# Altium PCB projet_pcb_wordclock.PCBDOC
Units mm, origin at the board's own origin, x right, y up, seen from the top; angles counter-clockwise.
Board outline 200.03 x 200.03 mm, 2 copper layers (TopLayer, BottomLayer); 83 components, 38 nets, 243 pads, 77 vias.
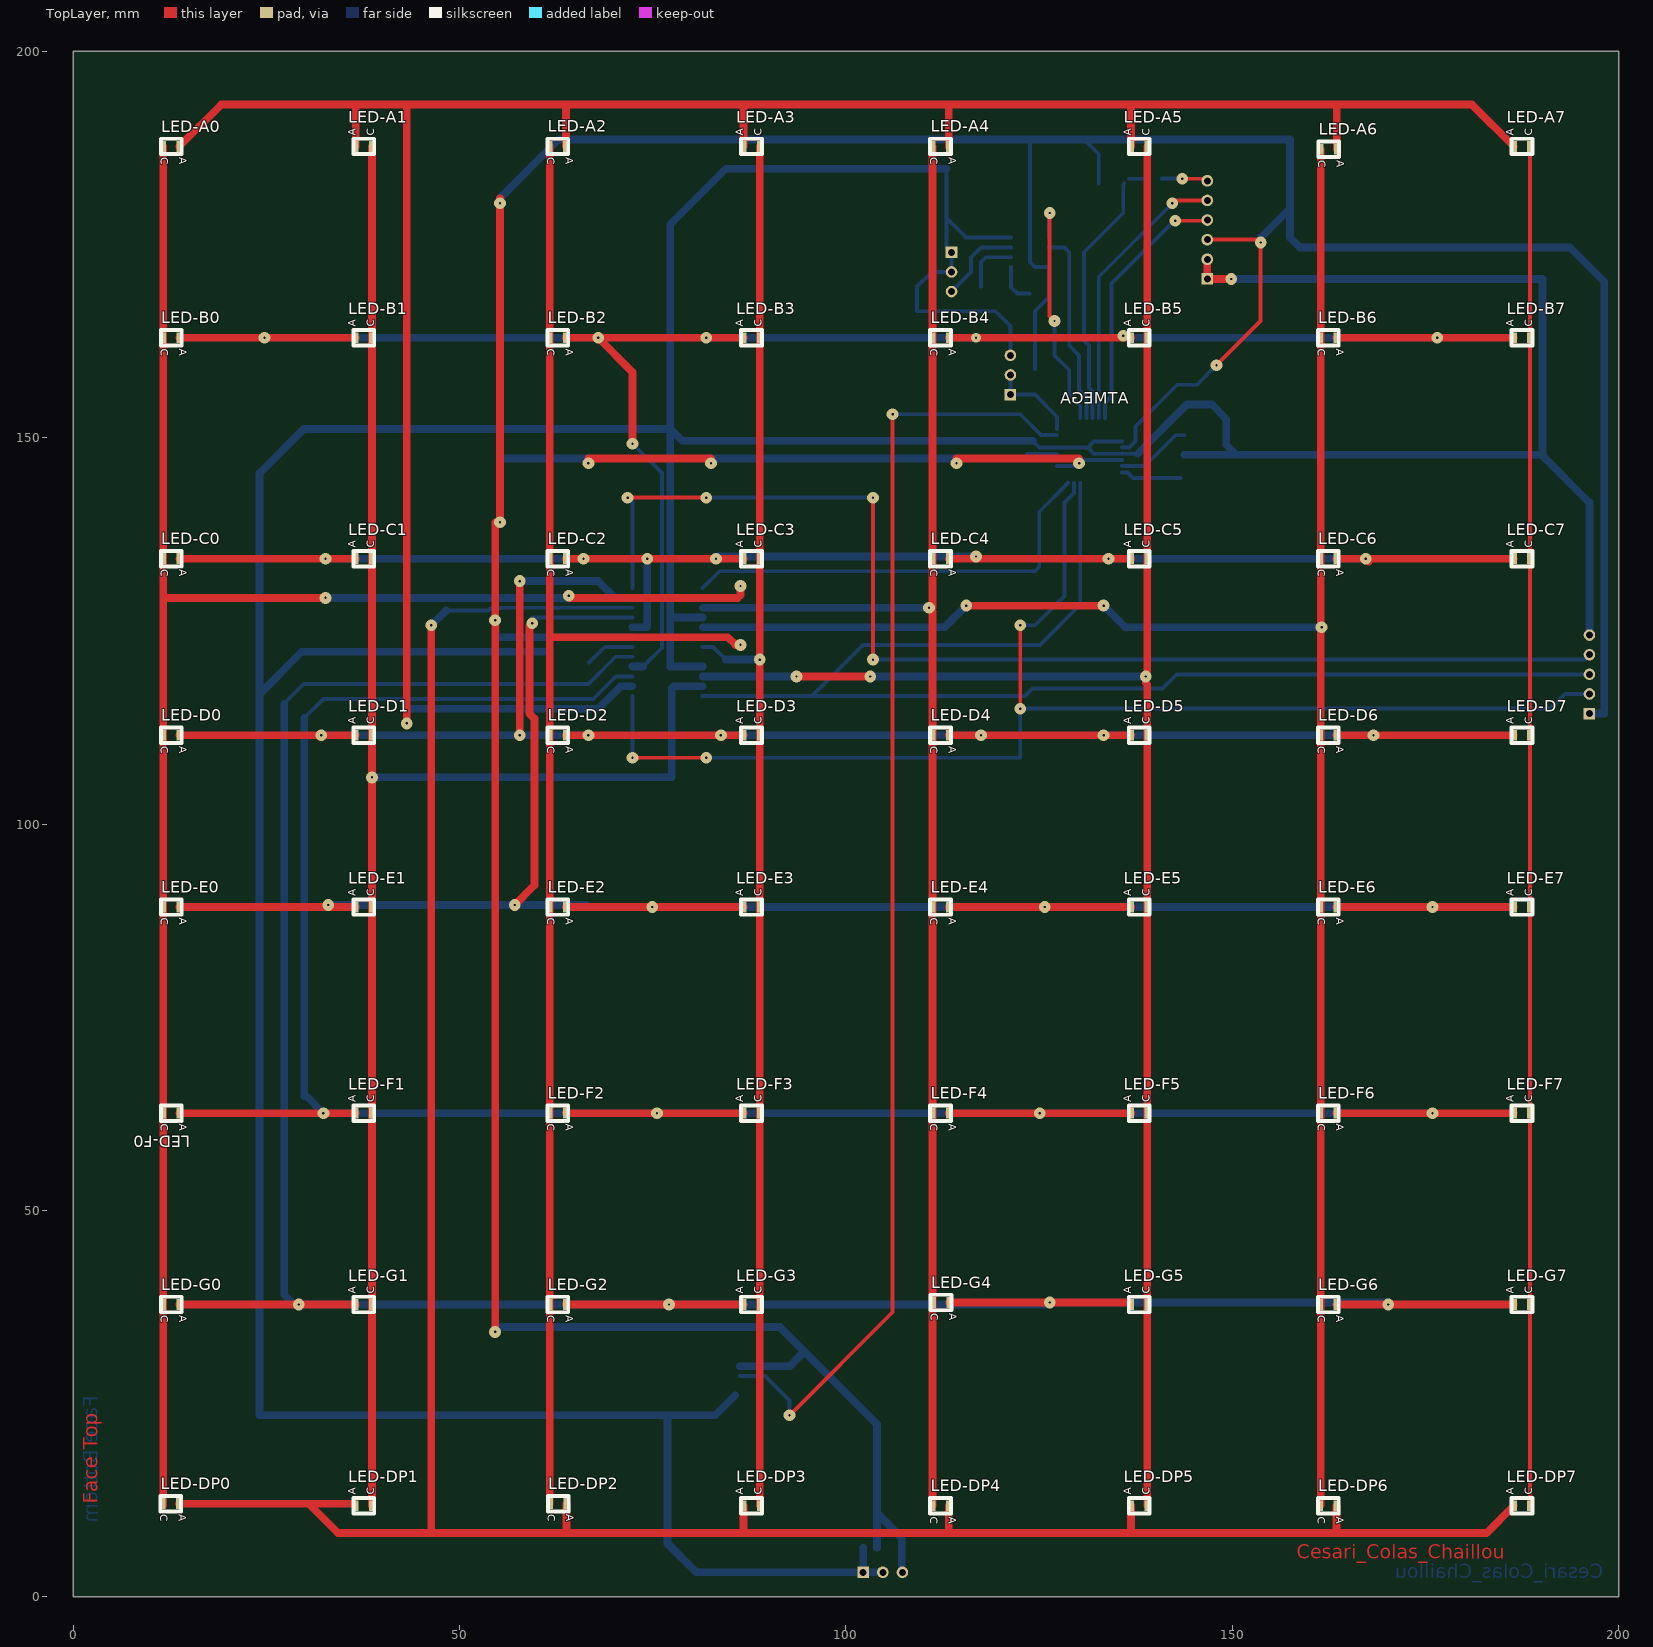
[diagram p0: TopLayer view]
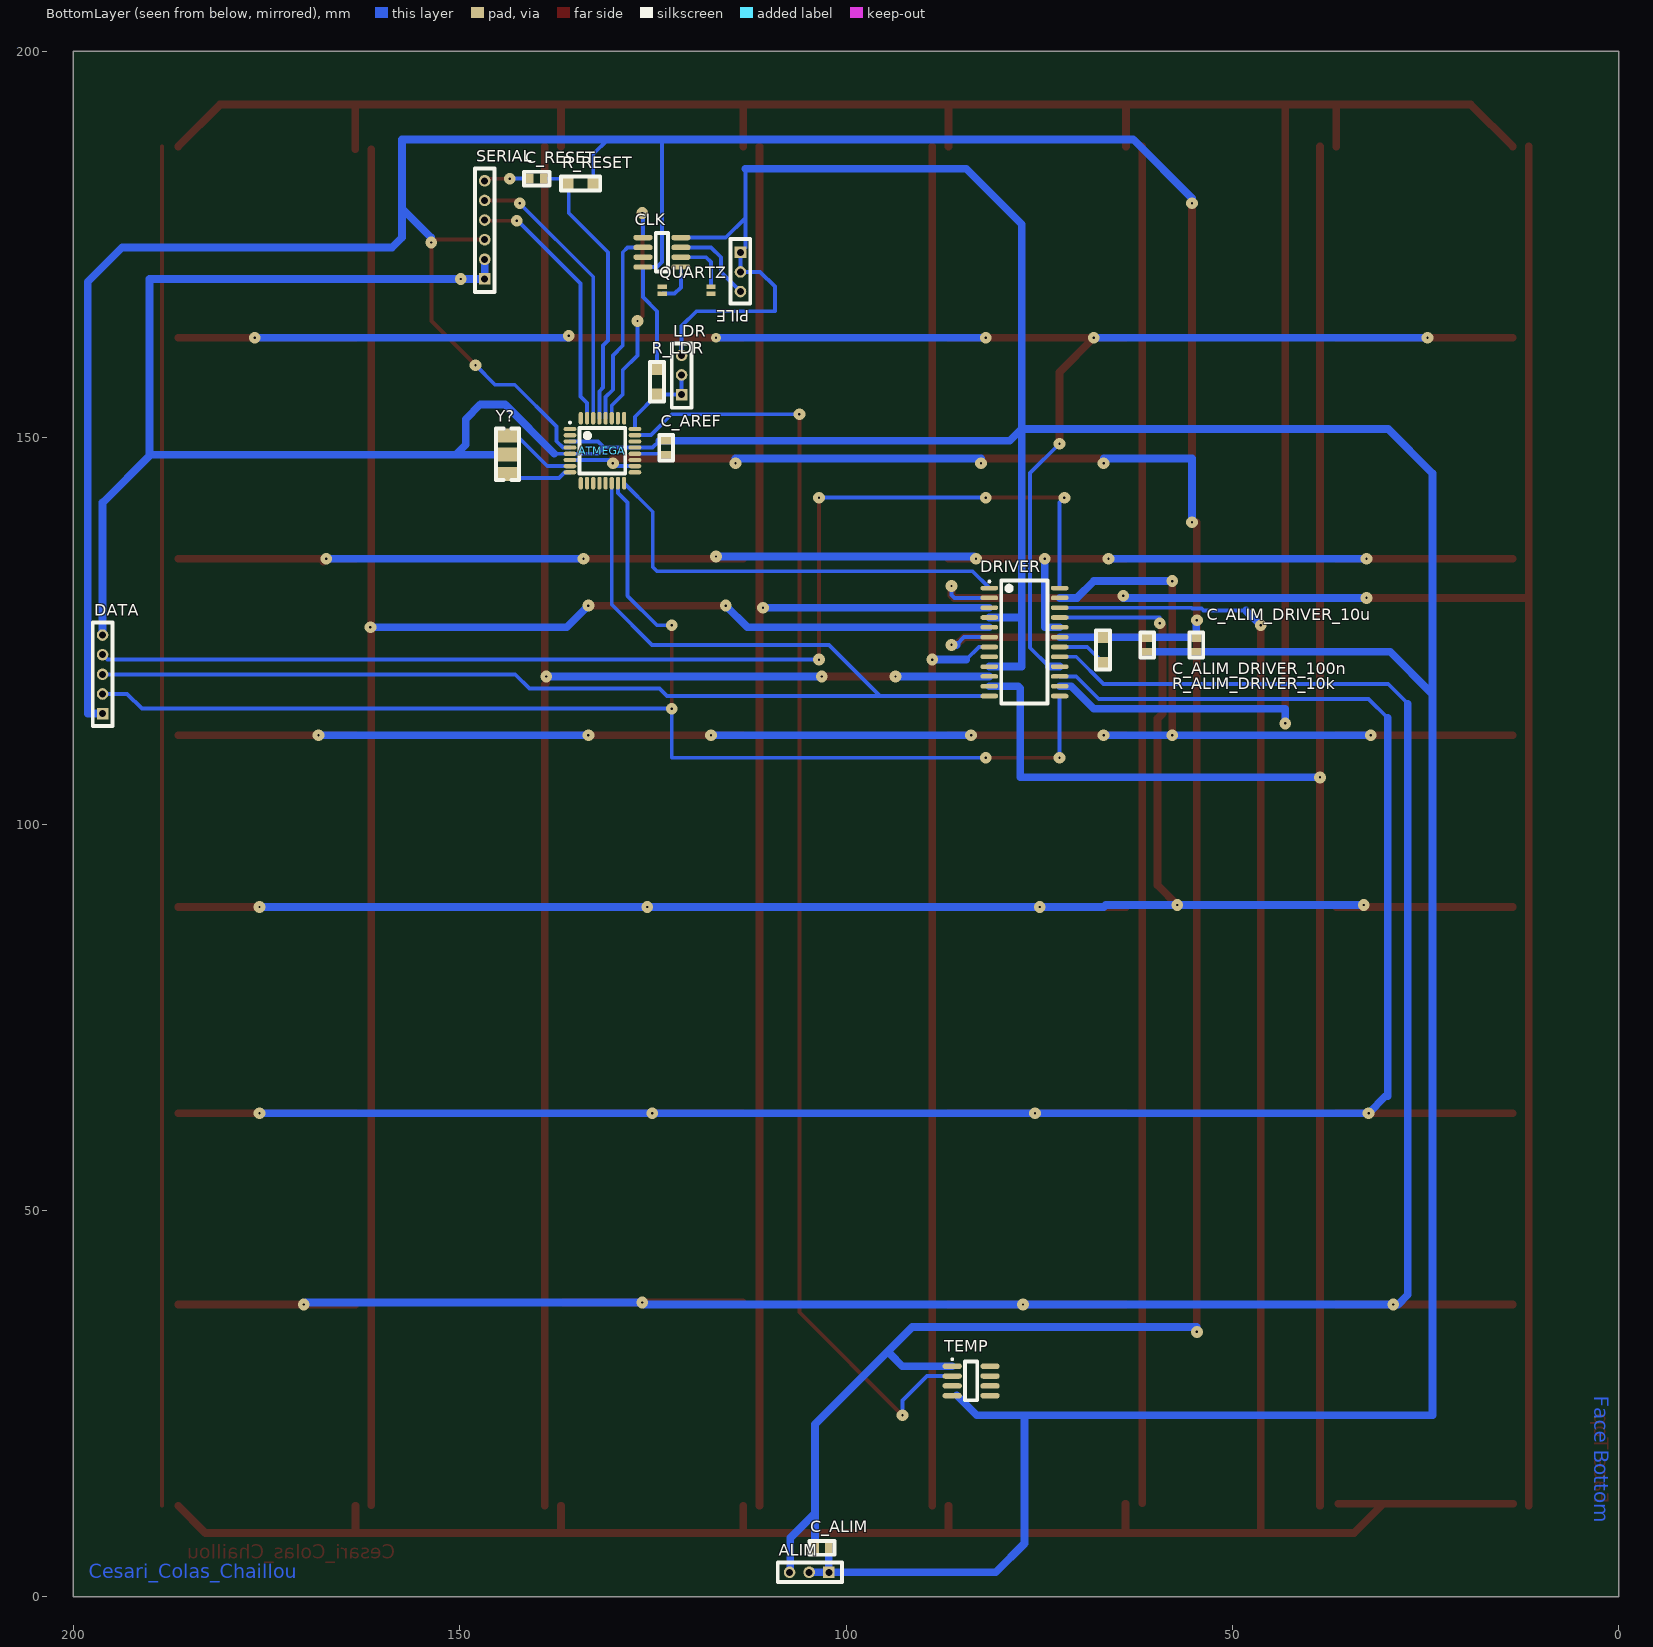
[diagram p1: BottomLayer view, seen from below]
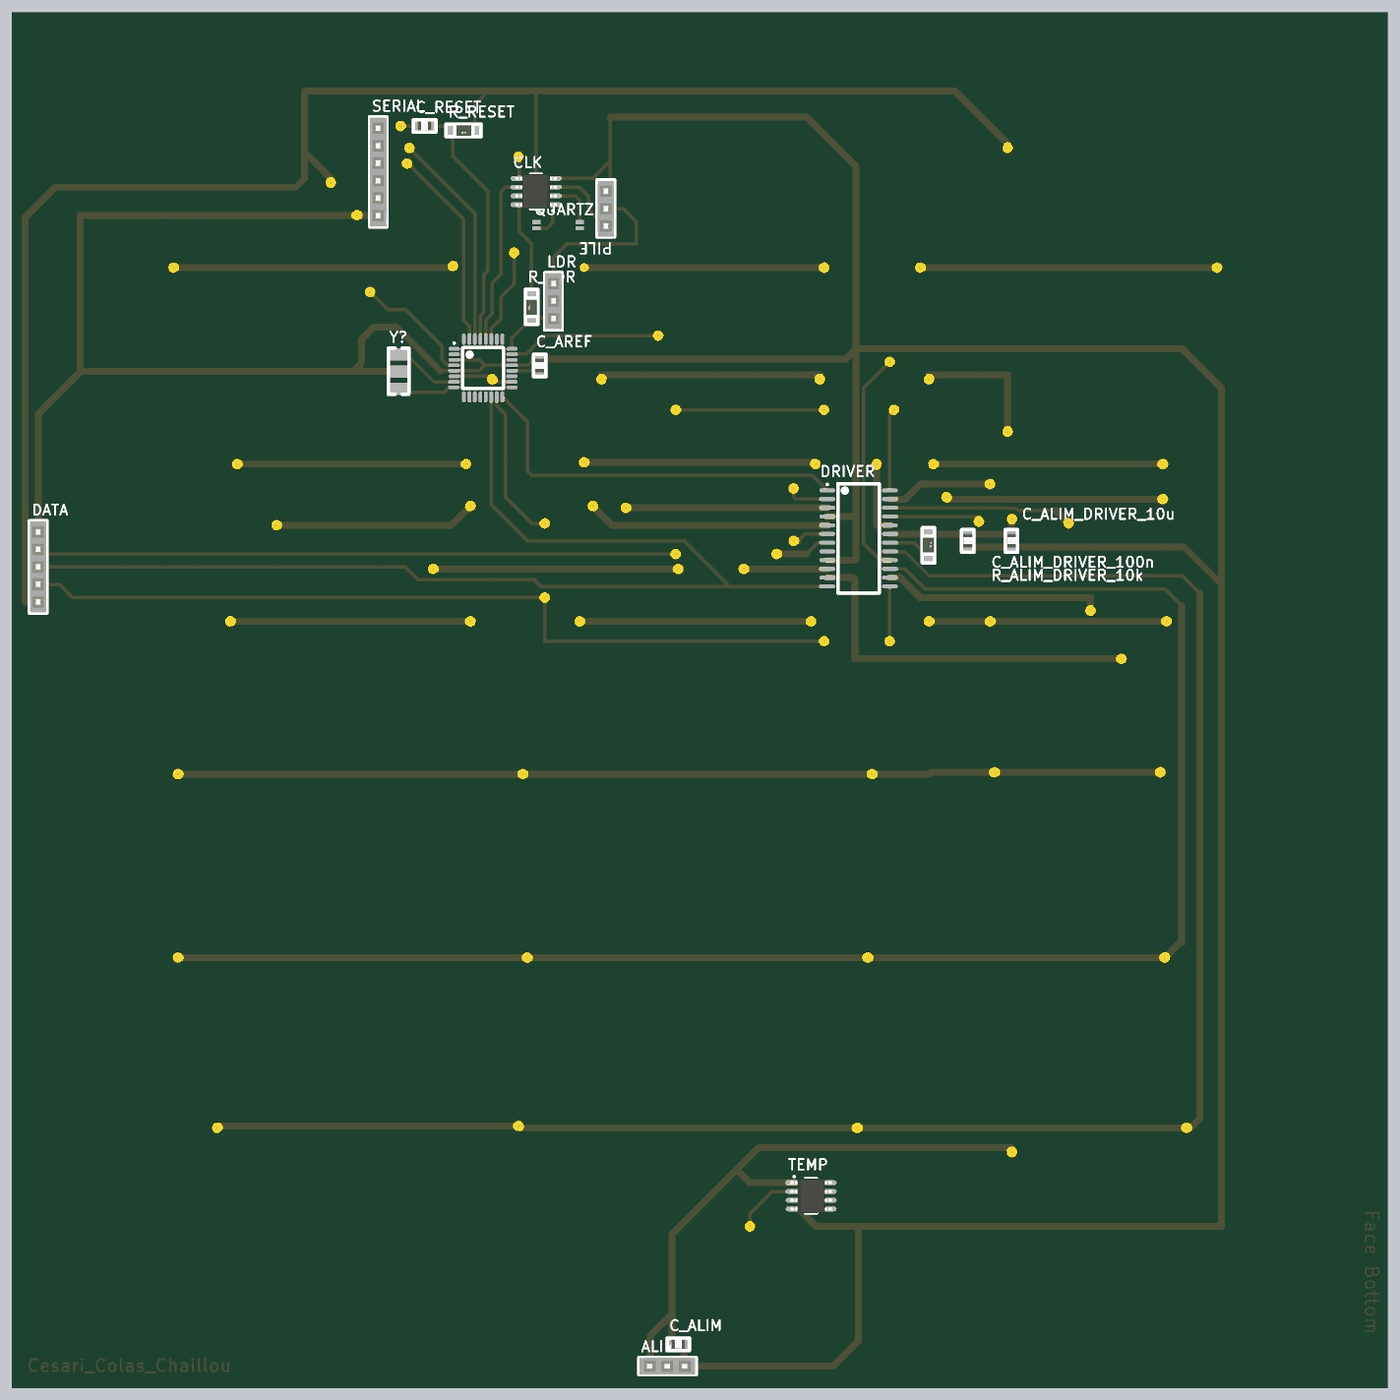
[diagram p2: 3D render of the assembled board from below, using the file's embedded part models]

## Layer stack, top to bottom
TopSolder: solder mask 0.0102, Solder Resist, Dk 3.5
TopLayer: signal copper 0.0356
Dielectric1: core 0.32, FR-4, Dk 4.8
BottomLayer: signal copper 0.0356
BottomSolder: solder mask 0.0102, Solder Resist, Dk 3.5

## Board outline
0,0 0,200.025 200.025,200.025 200.025,0

## Design rules (kind name [scope] priority, off if disabled: settings)
Clearance [All] p1: gap=0.25
FabricationTestPointUsage TestPointUsage [All] p1: valid=0 allowmultiple=FALSE
FabricationTestpoint Testpoint [All] p1: side=3 testpointundercomponent=TRUE minsize=1.016 maxsize=2.54 preferedsize=1.524 minholesize=0.508 maxholesize=1.016 preferedholesize=0.813 testpointgrid=0.025 allowsidetop=TRUE allowsidebottom=TRUE usegrid=TRUE gridtolerance=0
PlaneConnect [All] p1: planeconnectstyle=Relief reliefexpansion=0.5 reliefentries=4 reliefconductorwidth=1.016 reliefairgap=0.5
PolygonConnect [All] p1: connectstyle=Relief reliefconductorwidth=1.016 reliefentries=4 polygonreliefangle="90 Angle" airgapwidth=0.254
RoutingVias [All] p1: holewidth=0.3 width=1.524 viastyle="Through Hole" minholewidth=0.3 minwidth=1.524 maxholewidth=0.3 maxwidth=1.524
ShortCircuit [All] p1: allowed=TRUE
SilkToSolderMaskClearance SilkscreenOverComponentPads [IsPad] p1: minsilkscreentomaskgap=0.254 clearancetoexposedcopper=TRUE
SolderMaskExpansion [All] p1: expansion=0.051
Width Width_Power [(InNet('GND') OR InNet('+5V')  OR InNet('+3V3') OR InNet('VCC'))] p1: maxlimit=7.62 minlimit=0.406 preferedwidth=1.27
Width [All] p2: maxlimit=3 minlimit=0.5 preferedwidth=1 minimp=50.000000 maximp=50.000000 favimp=50.000000
24 further rules are at their usual default settings.

## Components (designator, comment, footprint, x,y, rotation, side; value= is the part's Value field where it differs from the comment)
ALIM "BARRETTE 3 CONTACTS 1 RANGEE FEMELLE DROITE" BARRETTE_3_F_D 102.235,3.175 r0 bottom
ATMEGA "ATmega328P-AU" 32A_N 131.525,148.32 r180 bottom
C_ALIM "CMS_0805" CONDENSATEUR_CMS_0805 102.235,6.35 r0 bottom
C_ALIM_DRIVER_10u "CMS_0805" CONDENSATEUR_CMS_0805 54.69,122.285 r90 bottom
C_ALIM_DRIVER_100n "CMS_0805" CONDENSATEUR_CMS_0805 61.04,122.285 r90 bottom
C_AREF "CMS_0805" CONDENSATEUR_CMS_0805 123.27,149.59 r270 bottom
C_RESET "CMS_0805" CONDENSATEUR_CMS_0805 139.129,183.515 r0 bottom
CLK "24AA1025_SOIC8" SOIC8_PAS=1.27_LARG=4_LONG=5 123.825,173.99 r0 bottom
DATA "BARRETTE_5 CONTACTS_1 RANGEE_FEMELLE_DROITE" BARRETTE_5_F_D 196.215,114.3 r90 bottom
DRIVER "MAX7219CWG" WSO24_N 76.915,123.555 r180 bottom
LDR "BARRETTE 3 CONTACTS 1 RANGEE FEMELLE DROITE" BARRETTE_3_F_D 121.285,155.575 r90 bottom
LED-A0 "LED_CMS_PLCC2" LED_CMS_PLCC2 14.05,187.69 r270 top
LED-A1 "LED_CMS_PLCC2" LED_CMS_PLCC2 36.275,187.69 r90 top
LED-A2 "LED_CMS_PLCC2" LED_CMS_PLCC2 64.075,187.69 r270 top
LED-A3 "LED_CMS_PLCC2" LED_CMS_PLCC2 86.44,187.69 r90 top
LED-A4 "LED_CMS_PLCC2" LED_CMS_PLCC2 113.605,187.69 r270 top
LED-A5 "LED_CMS_PLCC2" LED_CMS_PLCC2 136.605,187.69 r90 top
LED-A6 "LED_CMS_PLCC2" LED_CMS_PLCC2 163.83,187.325 r270 top
LED-A7 "LED_CMS_PLCC2" LED_CMS_PLCC2 186.135,187.69 r90 top
LED-B0 "LED_CMS_PLCC2" LED_CMS_PLCC2 14.05,162.925 r270 top
LED-B1 "LED_CMS_PLCC2" LED_CMS_PLCC2 36.275,162.925 r90 top
LED-B2 "LED_CMS_PLCC2" LED_CMS_PLCC2 64.075,162.925 r270 top
LED-B3 "LED_CMS_PLCC2" LED_CMS_PLCC2 86.44,162.925 r90 top
LED-B4 "LED_CMS_PLCC2" LED_CMS_PLCC2 113.605,162.925 r270 top
LED-B5 "LED_CMS_PLCC2" LED_CMS_PLCC2 136.605,162.925 r90 top
LED-B6 "LED_CMS_PLCC2" LED_CMS_PLCC2 163.77,162.925 r270 top
LED-B7 "LED_CMS_PLCC2" LED_CMS_PLCC2 186.135,162.925 r90 top
LED-C0 "LED_CMS_PLCC2" LED_CMS_PLCC2 14.05,134.35 r270 top
LED-C1 "LED_CMS_PLCC2" LED_CMS_PLCC2 36.275,134.35 r90 top
LED-C2 "LED_CMS_PLCC2" LED_CMS_PLCC2 64.075,134.35 r270 top
LED-C3 "LED_CMS_PLCC2" LED_CMS_PLCC2 86.44,134.35 r90 top
LED-C4 "LED_CMS_PLCC2" LED_CMS_PLCC2 113.605,134.35 r270 top
LED-C5 "LED_CMS_PLCC2" LED_CMS_PLCC2 136.605,134.35 r90 top
LED-C6 "LED_CMS_PLCC2" LED_CMS_PLCC2 163.77,134.35 r270 top
LED-C7 "LED_CMS_PLCC2" LED_CMS_PLCC2 186.135,134.35 r90 top
LED-D0 "LED_CMS_PLCC2" LED_CMS_PLCC2 14.05,111.49 r270 top
LED-D1 "LED_CMS_PLCC2" LED_CMS_PLCC2 36.275,111.49 r90 top
LED-D2 "LED_CMS_PLCC2" LED_CMS_PLCC2 64.075,111.49 r270 top
LED-D3 "LED_CMS_PLCC2" LED_CMS_PLCC2 86.44,111.49 r90 top
LED-D4 "LED_CMS_PLCC2" LED_CMS_PLCC2 113.605,111.49 r270 top
LED-D5 "LED_CMS_PLCC2" LED_CMS_PLCC2 136.605,111.49 r90 top
LED-D6 "LED_CMS_PLCC2" LED_CMS_PLCC2 163.77,111.49 r270 top
LED-D7 "LED_CMS_PLCC2" LED_CMS_PLCC2 186.135,111.49 r90 top
LED-DP0 "LED_CMS_PLCC2" LED_CMS_PLCC2 13.97,12.065 r270 top
LED-DP1 "LED_CMS_PLCC2" LED_CMS_PLCC2 36.275,11.795 r90 top
LED-DP2 "LED_CMS_PLCC2" LED_CMS_PLCC2 64.135,12.065 r270 top
LED-DP3 "LED_CMS_PLCC2" LED_CMS_PLCC2 86.44,11.795 r90 top
LED-DP4 "LED_CMS_PLCC2" LED_CMS_PLCC2 113.605,11.795 r270 top
LED-DP5 "LED_CMS_PLCC2" LED_CMS_PLCC2 136.605,11.795 r90 top
LED-DP6 "LED_CMS_PLCC2" LED_CMS_PLCC2 163.77,11.795 r270 top
LED-DP7 "LED_CMS_PLCC2" LED_CMS_PLCC2 186.135,11.795 r90 top
LED-E0 "LED_CMS_PLCC2" LED_CMS_PLCC2 14.05,89.265 r270 top
LED-E1 "LED_CMS_PLCC2" LED_CMS_PLCC2 36.275,89.265 r90 top
LED-E2 "LED_CMS_PLCC2" LED_CMS_PLCC2 64.075,89.265 r270 top
LED-E3 "LED_CMS_PLCC2" LED_CMS_PLCC2 86.44,89.265 r90 top
LED-E4 "LED_CMS_PLCC2" LED_CMS_PLCC2 113.605,89.265 r270 top
LED-E5 "LED_CMS_PLCC2" LED_CMS_PLCC2 136.605,89.265 r90 top
LED-E6 "LED_CMS_PLCC2" LED_CMS_PLCC2 163.77,89.265 r270 top
LED-E7 "LED_CMS_PLCC2" LED_CMS_PLCC2 186.135,89.265 r90 top
LED-F0 "LED_CMS_PLCC2" LED_CMS_PLCC2 14.05,62.595 r270 top
LED-F1 "LED_CMS_PLCC2" LED_CMS_PLCC2 36.275,62.595 r90 top
LED-F2 "LED_CMS_PLCC2" LED_CMS_PLCC2 64.075,62.595 r270 top
LED-F3 "LED_CMS_PLCC2" LED_CMS_PLCC2 86.44,62.595 r90 top
LED-F4 "LED_CMS_PLCC2" LED_CMS_PLCC2 113.605,62.595 r270 top
LED-F5 "LED_CMS_PLCC2" LED_CMS_PLCC2 136.605,62.595 r90 top
LED-F6 "LED_CMS_PLCC2" LED_CMS_PLCC2 163.77,62.595 r270 top
LED-F7 "LED_CMS_PLCC2" LED_CMS_PLCC2 186.135,62.595 r90 top
LED-G0 "LED_CMS_PLCC2" LED_CMS_PLCC2 14.05,37.83 r270 top
LED-G1 "LED_CMS_PLCC2" LED_CMS_PLCC2 36.275,37.83 r90 top
LED-G2 "LED_CMS_PLCC2" LED_CMS_PLCC2 64.075,37.83 r270 top
LED-G3 "LED_CMS_PLCC2" LED_CMS_PLCC2 86.44,37.83 r90 top
LED-G4 "LED_CMS_PLCC2" LED_CMS_PLCC2 113.665,38.1 r270 top
LED-G5 "LED_CMS_PLCC2" LED_CMS_PLCC2 136.605,37.83 r90 top
LED-G6 "LED_CMS_PLCC2" LED_CMS_PLCC2 163.77,37.83 r270 top
LED-G7 "LED_CMS_PLCC2" LED_CMS_PLCC2 186.135,37.83 r90 top
PILE "BARRETTE 3 CONTACTS 1 RANGEE FEMELLE DROITE" BARRETTE_3_F_D 113.665,173.99 r270 bottom
QUARTZ "QUARTZ 32.768KHZ, 12.5PF, 7 X 1.5MM" "QUARTZ_CMS_FA238_4PLOTS - duplicate" 117.475,169.545 r0 bottom
R_ALIM_DRIVER_10k "RESISTANCE_CMS_1206" RESISTANCE_CMS_1206 66.755,124.19 r270 bottom
R_LDR "RESISTANCE_CMS_1206" RESISTANCE_CMS_1206 124.46,155.575 r90 bottom
R_RESET "RESISTANCE_CMS_1206" RESISTANCE_CMS_1206 132.715,182.88 r0 bottom
SERIAL "BARRETTE_6 CONTACTS_1 RANGEE_FEMELLE_DROITE" BARRETTE_6_F_D 146.765,170.545 r90 bottom
TEMP "24AA1025_SOIC8" SOIC8_PAS=1.27_LARG=4_LONG=5 83.82,27.94 r180 bottom
Y? "OSCILLATEUR_CERA_CMS" OSCILLATEUR_CERA_CMS 142.32,144.51 r90 bottom

## Footprints (in the part's own frame and the unit in brackets; to place one, negate y for a bottom-side part, rotate by r counter-clockwise, add the part's x,y. Pads: shape width x height; smd on the part's side, far side on the other; paste and mask are expansions set on the pad)
32A_N [mm] "Thin QFP, 32-Leads, Body 7x7mm, Pitch 0.8mm, IPC Medium Density"
  oval 1.65x0.55 smd: 1(-4.2,2.8) 2(-4.2,2) 3(-4.2,1.2) 4(-4.2,0.4) 5(-4.2,-0.4) 6(-4.2,-1.2) 7(-4.2,-2) 8(-4.2,-2.8) 17(4.2,-2.8) 18(4.2,-2) 19(4.2,-1.2) 20(4.2,-0.4) 21(4.2,0.4) 22(4.2,1.2) 23(4.2,2) 24(4.2,2.8)
  oval 0.55x1.65 smd: 9(-2.8,-4.2) 10(-2,-4.2) 11(-1.2,-4.2) 12(-0.4,-4.2) 13(0.4,-4.2) 14(1.2,-4.2) 15(2,-4.2) 16(2.8,-4.2) 25(2.8,4.2) 26(2,4.2) 27(1.2,4.2) 28(0.4,4.2) 29(-0.4,4.2) 30(-1.2,4.2) 31(-2,4.2) 32(-2.8,4.2)
  silkscreen extent -4.33,-2.95 2.95,3.75, body extent -3.5,-3.5 3.5,3.5, height 1.2
BARRETTE_3_F_D [mm] "BARRETTE 3 CONTACTS ; 1 RANGEE ; DROITE ; FEMELLE ; ESPACEMENT BROCHES = 2.54 mm"
  rect 1.5x1.5 hole 0.9: 1(0,0)
  round 1.5 hole 0.9: 2(2.54,0) 3(5.08,0)
  silkscreen extent -1.7,-1.27 6.61,1.27, body extent -1.56,-1.21 6.56,1.2, height 8.5
BARRETTE_5_F_D [mm] "BARRETTE 5 CONTACTS ; 1 RANGEE ; DROITE ; FEMELLE ; ESPACEMENT BROCHES = 2.54 mm"
  rect 1.5x1.5 hole 0.9: 1(0,0)
  round 1.5 hole 0.9: 2(2.54,0) 3(5.08,0) 4(7.62,0) 5(10.16,0)
  silkscreen extent -1.6,-1.27 11.8,1.27, body extent -1.5,-1.2 11.7,1.21, height 8.5
BARRETTE_6_F_D [mm] "BARRETTE 6 CONTACTS ; 1 RANGEE ; DROITE ; FEMELLE ; ESPACEMENT BROCHES = 2.54 mm"
  rect 1.5x1.5 hole 0.9: 1(0,0)
  round 1.5 hole 0.9: 2(2.54,0) 3(5.08,0) 4(7.62,0) 5(10.16,0) 6(12.7,0)
  silkscreen extent -1.7,-1.27 14.3,1.27, body extent -1.57,-1.2 14.17,1.21, height 8.5
CONDENSATEUR_CMS_0805 [mm] "CONDENSATEUR CMS 0805 ; DIMENSIONS : 2mm x 1.25mm"
  rect 1x1.3 smd: 1(0,0) 2(1.79,-0.01)
  silkscreen extent -0.74,-0.9 2.53,0.89, body extent -0.09,-0.67 1.91,0.64, height 0.73
LED_CMS_PLCC2 [mm] "LED CMS PLCC2 ; DIMENSIONS : 2.7mm x 2.0mm"
  rect 1.4x0.75 smd: 1(0,-0.3) 2(0,-2.4)
  silkscreen extent -1,-2.7 1,0
OSCILLATEUR_CERA_CMS [mm] "OSCILLATEUR_CERA_CMS;  DIMENSIONS : 7.4mm x 3.4mm ; ESPACEMENT BROCHES : 1.5mm"
  rect 1.8x3.4 smd: 1(0.8,1.5) 2(5.8,1.5) 3(3.3,1.5)
  silkscreen extent 0,0 6.7,3
"QUARTZ_CMS_FA238_4PLOTS - duplicate" [mm] "QUARTZ 32.768KHZ, 12.5PF, 7 X 1.5MM"
  rect 1.2x0.6 smd: 1(0,0) 2(6.3,0) 3(6.3,0.9) 4(0,0.9)
RESISTANCE_CMS_1206 [mil] "RESISTANCE CMS 1206 ; DIMENSIONS : 3.2mm x 1.6mm"
  rect 60x60 smd: 1(0,0) 2(130,0)
  silkscreen extent -35,-35 165,35, body extent 0,-31 126,31, height 39
SOIC8_PAS=1.27_LARG=4_LONG=5 [mm] "Small Outline Integrated Circuit ; 8 Leads ; Body Width = 4 mm ; Pitch = 1.27 mm ; IPC Low Density"
  oval 2.5x0.7 smd: 1(-2.45,1.905) 2(-2.45,0.635) 3(-2.45,-0.635) 4(-2.45,-1.905) 5(2.45,-1.905) 6(2.45,-0.635) 7(2.45,0.635) 8(2.45,1.905)
  silkscreen extent -2.57,-2.5 0.8,2.93, body extent -3.01,-2.5 3,2.5, height 1.75
WSO24_N [mm] "SOIC, 24-Leads, Body 15.4x7.5mm, Pitch 1.27mm, IPC Medium Density"
  oval 2.3x0.6 smd: 1(-4.55,6.985) 2(-4.55,5.715) 3(-4.55,4.445) 4(-4.55,3.175) 5(-4.55,1.905) 6(-4.55,0.635) 7(-4.55,-0.635) 8(-4.55,-1.905) 9(-4.55,-3.175) 10(-4.55,-4.445) 11(-4.55,-5.715) 12(-4.55,-6.985) 13(4.55,-6.985) 14(4.55,-5.715) 15(4.55,-4.445) 16(4.55,-3.175) 17(4.55,-1.905) 18(4.55,-0.635) 19(4.55,0.635) 20(4.55,1.905) 21(4.55,3.175) 22(4.55,4.445) 23(4.55,5.715) 24(4.55,6.985)
  silkscreen extent -4.67,-7.95 3,7.96, body extent -3.8,-7.8 3.8,7.8, height 2.65

## Part data
ALIM LDR PILE: library part "BARRETTE_3 CONTACTS_1 RANGEE_FEMELLE_DROITE"
ATMEGA: "8-bit AVR Microcontroller, 32KB Flash, 1KB EEPROM, 2KB SRAM, 32-pin TQFP, Industrial Grade (-40°C to 85°C)"
C_ALIM C_ALIM_DRIVER_10u C_ALIM_DRIVER_100n C_AREF C_RESET: library part CONDENSATEUR_CMS_CER_0805, "CONDENSATEUR CMS CERAMIQUE 0805"
CLK TEMP: "MEMOIRE EEPROM SERIE 1024k - SOIC8"
DATA: "BARRETTE 5 CONTACTS 1 RANGEE FEMELLE DROITE"
DRIVER: "Serially Interfaced, 8-Digit LED Display Driver"
LED-A0 LED-A1 LED-A2 LED-A3 LED-A4 LED-A5 LED-A6 LED-A7 LED-B0 LED-B1 LED-B2 LED-B3 LED-B4 LED-B5 LED-B6 LED-B7 LED-C0 LED-C1 LED-C2 LED-C3 LED-C4 LED-C5 LED-C6 LED-C7 LED-D0 LED-D1 LED-D2 LED-D3 LED-D4 LED-D5 LED-D6 LED-D7 LED-DP0 LED-DP1 LED-DP2 LED-DP3 LED-DP4 LED-DP5 LED-DP6 LED-DP7 LED-E0 LED-E1 LED-E2 LED-E3 LED-E4 LED-E5 LED-E6 LED-E7 LED-F0 LED-F1 LED-F2 LED-F3 LED-F4 LED-F5 LED-F6 LED-F7 LED-G0 LED-G1 LED-G2 LED-G3 LED-G4 LED-G5 LED-G6 LED-G7: "LED CMS PLCC2"
R_ALIM_DRIVER_10k R_LDR R_RESET: "RESISTANCE CMS 1206"
SERIAL: "BARRETTE 6 CONTACTS 1 RANGEE FEMELLE DROITE"

## Via types
v1: diameter 1.524, hole 0.3, TopLayer to BottomLayer, 76 vias
v2: diameter 1.27, hole 0.3, TopLayer to BottomLayer, 1 vias

## Nets (pads, with @x,y where several pads share a name; then routed paths per layer and width w, separated by ;. In a path a pad name is that pad's centre, name@x,y a point inside that pad or via, vN(x,y) a via of type N, cw(c..) or ccw(c..) an arc to the next point about the centre after c; other vN are vias at no path point)
CLK: ATMEGA.15 DATA.2 DRIVER.13 | length 172.1
  TopLayer w0.5: v1(72.39,108.585) v1(81.915,108.585) ; v1(122.555,114.935) v1(122.555,125.73)
  BottomLayer w0.5: DRIVER.13 72.365,108.61 v1(72.39,108.585) ; v1(81.915,108.585) 122.555,108.585 v1(122.555,114.935) 191.135,114.935 193.04,116.84 DATA.2 ; v1(122.555,125.73) 124.46,125.73 128.27,129.54 128.27,141.605 129.525,142.86 ATMEGA.15
DIN: ATMEGA.16 DRIVER.1 | length 57.1
  BottomLayer w0.5: DRIVER.1 83.64,132.715 124.46,132.715 125.018,133.273 125.018,140.412 ATMEGA.16
DOUT: DATA.4 DRIVER.24 | length 157.6
  TopLayer w0.5: v1(71.755,142.24) v1(81.915,142.24) ; v1(103.505,121.285) v1(103.505,142.24)
  BottomLayer w0.5: v1(71.755,142.24) 72.365,141.63 DRIVER.24 ; v1(81.915,142.24) v1(103.505,142.24) ; v1(103.505,121.285) 195.58,121.285 DATA.4
DTR: C_RESET.2 SERIAL.6 | length 6
  TopLayer w0.5: v1(143.51,183.515) 146.495,183.515 SERIAL.6
  BottomLayer w0.5: C_RESET.2 143.5,183.525 v1(143.51,183.515)
GND: ALIM.1 ALIM.2 ATMEGA.3 ATMEGA.5 ATMEGA.21 C_ALIM.1 C_ALIM_DRIVER_10u.1 C_ALIM_DRIVER_100n.1 C_AREF.1 CLK.4 DATA.5 DRIVER.4 DRIVER.9 LDR.3 PILE.1 PILE.2 SERIAL.1 SERIAL.2 TEMP.4 Y?.3 | length 713.6
  TopLayer w1: SERIAL.2 SERIAL.1 v1(149.86,170.545)
  BottomLayer w0.5: 113.03,184.785 113.03,178.435 ; LDR.3 121.285,164.465 119.38,166.37 109.22,166.37 109.22,169.545 111.125,171.45 PILE.2 PILE.1 113.03,174.625 113.03,178.435 ; CLK.4 115.57,175.895 113.03,178.435 ; 124.183,149.59 125.053,148.72 ATMEGA.21 131.315,148.72 ; ATMEGA.3 132.115,149.52 131.315,148.72 ; ATMEGA.5@135.746,147.941 ATMEGA.5 ; 137.76,147.92 ATMEGA.5 ; 131.315,148.72 132.115,147.92 ATMEGA.5
  BottomLayer w1: C_ALIM_DRIVER_100n.1 C_ALIM_DRIVER_10u.1 29.575,122.285 24.13,116.84 ; 76.835,23.495 24.13,23.495 24.13,116.84 ; DRIVER.9 77.28,120.38 77.28,126.73 ; DRIVER.4 77.28,126.73 ; TEMP.4@85.68,26.08 83.095,23.495 76.915,23.495 76.915,6.905 80.645,3.175 ALIM.1 ; C_ALIM.1 ALIM.1 ; ALIM.2 ALIM.1 ; 113.03,184.785 84.455,184.785 77.28,177.61 77.28,151.13 ; 124.183,149.59 C_AREF.1 78.82,149.59 77.28,151.13 ; 137.76,147.92 144.145,154.305 147.32,154.305 149.225,152.4 149.225,149.08 150.495,147.81 ; Y?.3 150.495,147.81 ; SERIAL.2 SERIAL.1 v1(149.86,170.545) 190.135,170.545 190.135,147.935 ; DATA.5 196.215,141.605 190.01,147.81 150.495,147.81 ; 24.13,116.84 24.13,145.415 29.845,151.13 77.28,151.13 ; 77.28,126.73 77.28,151.13
LDR: ATMEGA.24 LDR.1 LDR.2 R_LDR.1 | length 11.4
  BottomLayer w0.5: LDR.2 LDR.1 R_LDR.1 127.325,152.71 ATMEGA.24
LED0: DRIVER.2 LED-A0.2 LED-B0.2 LED-C0.2 LED-D0.2 LED-DP0.2 LED-E0.2 LED-F0.2 LED-G0.2 | length 257.5
  TopLayer w1: LED-DP0.2@11.65,11.795 LED-G0.2 LED-F0.2 LED-E0.2 LED-D0.2 LED-C0.2 LED-B0.2 LED-A0.2 ; 11.92,129.27 v1(32.655,129.27) ; v1@64.5,129.27 85.995,129.27 86.36,129.635 v1(86.36,130.81)
  BottomLayer w0.5: DRIVER.2 85.995,129.27 86.36,129.635 v1(86.36,130.81)
  BottomLayer w1: v1(32.655,129.27) v1@64.135,129.27
  other v1: 64.135,129.54
LED1: DRIVER.11 LED-A1.2 LED-B1.2 LED-C1.2 LED-D1.2 LED-DP1.2 LED-E1.2 LED-F1.2 LED-G1.2 | length 230.3
  TopLayer w1: LED-DP1.2 LED-G1.2 LED-F1.2 LED-E1.2 v1(38.675,106.045) LED-D1.2 LED-C1.2 LED-B1.2 LED-A1.2
  BottomLayer w1: v1(38.675,106.045) 77.47,106.045 77.47,117.57 77.74,117.84 DRIVER.11
LED2: DRIVER.6 LED-A2.2 LED-B2.2 LED-C2.2 LED-D2.2 LED-DP2.2 LED-E2.2 LED-F2.2 LED-G2.2 | length 206
  TopLayer w1: LED-DP2.2@61.675,12.125 LED-G2.2 LED-F2.2 LED-E2.2 LED-D2.2 LED-C2.2 LED-B2.2 LED-A2.2 ; 61.68,124.19 84.725,124.19 85.725,123.19 v1(86.36,123.19)
  BottomLayer w0.5: DRIVER.6 84.725,124.19 v1@85.725,123.19
  BottomLayer w1: v1@85.725,123.19 v1(86.36,123.19)
LED3: DRIVER.7 LED-A3.2 LED-B3.2 LED-C3.2 LED-D3.2 LED-DP3.2 LED-E3.2 LED-F3.2 LED-G3.2 | length 183.9
  TopLayer w1: LED-DP3.2 LED-G3.2 LED-F3.2 LED-E3.2 LED-D3.2 v1(88.84,121.285) LED-C3.2 LED-B3.2 LED-A3.2
  BottomLayer w0.5: DRIVER.7 82.82,122.92 84.455,121.285
  BottomLayer w1: 84.455,121.285 v1(88.84,121.285)
LED4: DRIVER.3 LED-A4.2 LED-B4.2 LED-C4.2 LED-D4.2 LED-DP4.2 LED-E4.2 LED-F4.2 LED-G4.2 | length 205.4
  TopLayer w1: v1(110.76,128) 111.205,127.555 111.205,126.365 LED-D4.2 LED-E4.2 LED-F4.2 LED-DP4.2 ; v1@111.205,128 LED-C4.2 LED-B4.2 LED-A4.2
  BottomLayer w1: DRIVER.3 v1(110.76,128)
LED5: DRIVER.10 LED-A5.2 LED-B5.2 LED-C5.2 LED-D5.2 LED-DP5.2 LED-E5.2 LED-F5.2 LED-G5.2 | length 233.3
  TopLayer w1: v1(93.615,119.11) v1(103.14,119.11) ; v1(138.795,119.11) 138.795,118.32 139.005,118.11 LED-D5.2 LED-E5.2 LED-F5.2 LED-G5.2 LED-DP5.2 ; v1@139.005,119.11 LED-C5.2 LED-B5.2 LED-A5.2
  BottomLayer w1: DRIVER.10 v1(93.615,119.11) ; v1(103.14,119.11) v1(138.795,119.11)
LED6: DRIVER.5 LED-A6.2 LED-B6.2 LED-C6.2 LED-D6.2 LED-DP6.2 LED-E6.2 LED-F6.2 LED-G6.2 | length 257.3
  TopLayer w1: v1(115.57,128.27) v1@132.715,128.27 ; LED-DP6.2@161.43,11.855 LED-A6.2
  BottomLayer w1: DRIVER.5 112.76,125.46 v1(115.57,128.27) ; v1(133.35,128.27) 136.16,125.46 v1(161.56,125.46)
LED7: DRIVER.8
LEDA: DRIVER.14 LED-A0.1 LED-A1.1 LED-A2.1 LED-A3.1 LED-A4.1 LED-A5.1 LED-A6.1 LED-A7.1 | length 321
  TopLayer w1: LED-A0.1 19.165,193.105 43.18,193.105 ; LED-A1.1 36.575,192.805 ; v1(43.18,113.03) 43.18,193.105 ; LED-A2.1 63.775,192.745 ; LED-A3.1 86.74,192.805 ; LED-A4.1 113.305,192.83 ; LED-A5.1 136.905,192.805 ; LED-A6.1 163.53,192.77 163.195,193.105 ; LED-A7.1 181.02,193.105 163.195,193.105 ; 43.18,193.105 163.195,193.105
  BottomLayer w1: v1(43.18,113.03) 43.18,114.935 67.945,114.935 70.85,117.84 DRIVER.14
LEDB: DRIVER.16 LED-B0.1 LED-B1.1 LED-B2.1 LED-B3.1 LED-B4.1 LED-B5.1 LED-B6.1 LED-B7.1 | length 259.5
  TopLayer w1: LED-B0.1 v1(24.765,162.925) LED-B1.1 ; LED-B2.1 v1(67.945,162.925) ; v1(72.39,149.225) 72.39,158.48 v1(67.945,162.925) ; LED-B3.1 v1(81.915,162.925) v1(67.945,162.925) ; LED-B4.1 LED-B5.1 ; LED-B6.1 v1(176.53,162.925) LED-B7.1
  BottomLayer w0.5: v1(72.39,149.225) 76.2,145.415 76.2,122.814 73.766,120.38
  BottomLayer w1: v1(24.765,162.925) v1(67.945,162.925) ; DRIVER.16 73.766,120.38 ; v1(81.915,162.925) v2(116.84,162.925) ; v1@135.89,162.925 v1(176.53,162.925)
  other v1: 135.89,163.195
LEDC: DRIVER.20 LED-C0.1 LED-C1.1 LED-C2.1 LED-C3.1 LED-C4.1 LED-C5.1 LED-C6.1 LED-C7.1 | length 204.4
  TopLayer w1: LED-C0.1 v1(32.655,134.35) LED-C1.1 ; LED-C2.1 v1(66.04,134.35) v1(74.295,134.35) v1(83.185,134.35) LED-C3.1 ; LED-C4.1 v1@116.84,134.35 ; v1(116.84,134.62) v1@116.84,134.35 ; LED-C5.1 v1(133.985,134.35) v1@116.84,134.35 ; LED-C6.1 v1(167.275,134.35) ; v1@167.64,133.985 v1(167.275,134.35) ; LED-C7.1 v1(167.275,134.35)
  BottomLayer w1: v1(32.655,134.35) v1(66.04,134.35) ; DRIVER.20 74.295,125.46 v1(74.295,134.35) ; v1(83.185,134.35) 83.455,134.62 v1(116.84,134.62) ; v1(133.985,134.35) v1(167.275,134.35)
LEDD: DRIVER.23 LED-D0.1 LED-D1.1 LED-D2.1 LED-D3.1 LED-D4.1 LED-D5.1 LED-D6.1 LED-D7.1 | length 230.9
  TopLayer w1: LED-D0.1 v1(32.115,111.49) LED-D1.1 ; v1(57.785,111.49) v1(57.785,131.445) ; LED-D2.1 v1(66.675,111.49) v1(83.82,111.49) LED-D3.1 ; LED-D4.1 v1(117.475,111.49) v1(133.35,111.49) LED-D5.1 ; LED-D6.1 v1(168.275,111.49) LED-D7.1
  BottomLayer w1: v1(32.115,111.49) v1(57.785,111.49) v1(66.675,111.49) ; v1(57.785,131.445) 67.945,131.445 70.12,129.27 DRIVER.23 ; v1(83.82,111.49) v1(117.475,111.49) ; v1(133.35,111.49) v1(168.275,111.49)
LEDDP: DRIVER.22 LED-DP0.1 LED-DP1.1 LED-DP2.1 LED-DP3.1 LED-DP4.1 LED-DP5.1 LED-DP6.1 LED-DP7.1 | length 342.8
  TopLayer w1: LED-DP0.1 30.48,12.065 ; LED-DP1.1@36.305,12.065 30.48,12.065 ; v1(46.355,125.73) 46.355,8.255 ; 63.835,8.59 LED-DP2.1 ; 86.74,8.635 LED-DP3.1 ; LED-DP4.1 113.305,8.53 113.03,8.255 ; 136.905,8.635 LED-DP5.1 ; 163.47,8.53 LED-DP6.1 ; LED-DP7.1 182.895,8.255 113.03,8.255 ; 30.48,12.065 34.29,8.255 46.355,8.255 ; 46.355,8.255 113.03,8.255
  BottomLayer w0.5: 48.26,127.635 53.742,127.635 53.984,127.877 55.201,127.877 55.324,128 DRIVER.22
  BottomLayer w1: v1(46.355,125.73) 48.26,127.635
LEDE: DRIVER.21 LED-E0.1 LED-E1.1 LED-E2.1 LED-E3.1 LED-E4.1 LED-E5.1 LED-E6.1 LED-E7.1 | length 286.9
  TopLayer w1: LED-E0.1 LED-E1.1 ; v1(57.15,89.535) 59.69,92.075 59.69,113.665 59.055,114.3 59.055,125.635 v1(59.42,126) ; LED-E2.1 66.675,89.265 82.55,89.265 LED-E3.1 ; LED-E4.1 v1(125.73,89.265) LED-E5.1 ; LED-E6.1 v1(175.895,89.265) LED-E7.1
  BottomLayer w0.5: v1(59.42,126) 59.42,126.73 DRIVER.21
  BottomLayer w1: v1(33.02,89.535) v1(57.15,89.535) 66.405,89.535 66.675,89.265 v1(74.93,89.265) v1(125.73,89.265) v1(175.895,89.265)
LEDF: DRIVER.15 LED-F0.1 LED-F1.1 LED-F2.1 LED-F3.1 LED-F4.1 LED-F5.1 LED-F6.1 LED-F7.1 | length 332.9
  TopLayer w1: LED-F0.1 v1(32.385,62.595) LED-F1.1 ; LED-F2.1 LED-F3.1 ; LED-F4.1 v1(125.095,62.595) LED-F5.1 ; LED-F6.1 v1(175.895,62.595) LED-F7.1
  BottomLayer w0.5: 29.914,113.734 32.385,116.205 67.31,116.205 70.215,119.11 DRIVER.15
  BottomLayer w1: 29.914,113.734 29.914,64.77 30.21,64.77 v1(32.385,62.595) v1(75.565,62.595) v1(125.095,62.595) v1(175.895,62.595)
LEDG: DRIVER.17 LED-G0.1 LED-G1.1 LED-G2.1 LED-G3.1 LED-G4.1 LED-G5.1 LED-G6.1 LED-G7.1 | length 359.1
  TopLayer w1: LED-G0.1 v1(29.21,37.83) LED-G1.1 ; LED-G2.1 v1(77.105,37.83) LED-G3.1 ; LED-G4.1 v1(126.365,38.1) LED-G5.1@136.635,38.1 ; LED-G6.1 v1(170.18,37.83) LED-G7.1
  BottomLayer w0.5: 27.305,115.57 29.845,118.11 66.675,118.11 70.215,121.65 DRIVER.17
  BottomLayer w1: 27.305,115.57 27.305,39.1 v1@28.575,37.83 ; v1(29.21,37.83) v1(77.105,37.83) 126.095,37.83 v1(126.365,38.1) 169.91,38.1 v1(170.18,37.83)
LOAD: ATMEGA.14 DATA.3 DRIVER.12 | length 171.2
  BottomLayer w0.5: DRIVER.12 95.615,116.57 ; ATMEGA.14 130.325,128.42 125.095,123.19 102.235,123.19 95.615,116.57 ; DATA.3 142.806,119.38 140.97,117.544 124.168,117.544 123.194,116.57 95.615,116.57
NetATMEGA_7: ATMEGA.7 Y?.2 | length 9.7
  BottomLayer w0.5: ATMEGA.7 138.669,146.32 142.659,150.31 Y?.2
NetATMEGA_8: ATMEGA.8 Y?.1 | length 7.9
  BottomLayer w0.5: ATMEGA.8 136.42,145.52 137.16,144.78 Y?.1@143.29,144.78
NetATMEGA_20: ATMEGA.20 C_AREF.2 | length 3.9
  BottomLayer w0.5: C_AREF.2@123.4,147.92 ATMEGA.20
NetATMEGA_29: ATMEGA.29 C_RESET.1 R_RESET.2 | length 35.3
  BottomLayer w0.5: ATMEGA.29 131.925,156.01 131.445,156.49 131.445,161.925 130.81,162.56 130.81,173.99 135.89,179.07 135.89,182.753 R_RESET.2 ; R_RESET.2@136.652,183.515 C_RESET.1@139.005,183.515
NetCLK_1: CLK.1 QUARTZ.3 | length 5.4
  BottomLayer w0.5: CLK.1 121.375,169.455 122.185,168.645 QUARTZ.3
NetCLK_2: CLK.2 QUARTZ.1 | length 7.3
  BottomLayer w0.5: QUARTZ.1 117.475,172.72 118.11,173.355 CLK.2
NetCLK_3: CLK.3 PILE.3 | length 11.2
  BottomLayer w0.5: PILE.3 116.205,171.45 116.205,173.355 117.475,174.625 CLK.3
NetDRIVER_18: DRIVER.18 R_ALIM_DRIVER_10k.2 | length 6.5
  BottomLayer w0.5: R_ALIM_DRIVER_10k.2 68.787,122.92 DRIVER.18
NETLABEL19: LED-A7.2 LED-B7.2 LED-C7.2 LED-D7.2 LED-DP7.2 LED-E7.2 LED-F7.2 LED-G7.2 | length 175.9
  TopLayer w0.5: LED-DP7.2 LED-G7.2 LED-F7.2 LED-E7.2 LED-D7.2 LED-C7.2 LED-B7.2 LED-A7.2
RX: ATMEGA.30 SERIAL.5 | length 36.4
  TopLayer w0.5: v1(142.24,180.34) 142.605,180.705 SERIAL.5
  BottomLayer w0.5: ATMEGA.30@132.719,152.526 ATMEGA.30 132.725,170.825 v1(142.24,180.34)
SCL: ATMEGA.28 CLK.6 | length 25.3
  BottomLayer w0.5: CLK.6 128.27,174.625 128.905,173.99 128.905,161.925 130.175,160.655 130.175,156.21 131.125,155.26 ATMEGA.28
SDA: ATMEGA.27 CLK.5 | length 31.4
  TopLayer w0.508: v1(126.365,179.07) 126.365,165.735 v1(127,165.1)
  BottomLayer w0.508: CLK.5 126.275,178.98 v1(126.365,179.07) ; v1(127,165.1) 127,160.655 128.905,158.75 128.905,155.575 130.325,154.155 ATMEGA.27
TEMP: ATMEGA.23 TEMP.2 | length 167.1
  TopLayer w0.5: v1(92.71,23.495) 106.045,36.83 v1(106.045,153.035)
  BottomLayer w0.5: TEMP.2 89.535,28.575 92.71,25.4 v1(92.71,23.495) ; v1(106.045,153.035) 122.555,153.035 125.249,150.341 127.304,150.341 ATMEGA.23
TX: ATMEGA.31 SERIAL.4 | length 33.6
  TopLayer w0.5: v1(142.605,178.07) SERIAL.4@146.67,178.07
  BottomLayer w0.5: ATMEGA.31 133.525,154.48 134.378,155.333 134.378,169.938 142.605,178.165 v1(142.605,178.07)
VCC: ALIM.3 ATMEGA.4 ATMEGA.6 ATMEGA.18 C_ALIM.2 C_ALIM_DRIVER_10u.2 C_ALIM_DRIVER_100n.2 CLK.8 DATA.1 DRIVER.19 R_ALIM_DRIVER_10k.1 R_LDR.2 R_RESET.1 SERIAL.3 TEMP.1 | length 648.3
  TopLayer w0.5: SERIAL.3 v1@153.305,175.625 ; v1(147.955,159.385) 153.67,165.1 v1(153.67,175.26)
  TopLayer w1: v1@54.61,34.925 v1@54.61,139.065 ; v1@55.245,139.7 v1@55.245,180.975 ; v1@66.675,147.32 v1@82.55,147.32 ; v1@114.3,147.32 v1@130.175,147.32
  BottomLayer w0.5: 123.825,188.595 123.825,172.72 124.46,172.085 CLK.8 126.275,168.185 124.46,166.37 R_LDR.2 ; ATMEGA.18 v1@129.81,146.32 ; v1@130.61,147.12 ATMEGA.6 ; 130.81,188.595 132.715,186.69 R_RESET.1 ; ATMEGA.4 136.655,148.72 137.483,149.548 137.483,151.453 142.875,156.845 145.415,156.845 v1(147.955,159.385)
  BottomLayer w1: v1@54.61,34.925 91.44,34.925 104.025,22.34 104.025,10.805 ; 54.68,124.71 v1@54.68,126.365 ; C_ALIM_DRIVER_10u.2@54.795,124.19 R_ALIM_DRIVER_10k.1 DRIVER.19 ; v1@55.245,139.7 55.245,147.32 v1@66.675,147.32 ; v1@55.245,180.975 62.865,188.595 123.825,188.595 130.81,188.595 157.48,188.595 157.48,179.705 ; v1@82.55,147.32 v1@114.3,147.32 ; TEMP.1 92.71,29.845 94.297,31.432 ; C_ALIM.2 104.025,10.805 ; ALIM.3@107.21,3.81 107.21,7.62 104.025,10.805 ; v1@153.67,175.895 157.48,179.705 ; DATA.1 198.12,114.3 198.12,170.18 193.675,174.625 158.75,174.625 157.48,175.895 157.48,179.705
  other v1: 54.61,34.29 54.61,126.365 55.245,139.065 66.675,146.685 82.55,146.685 114.3,146.685 130.175,146.685 55.245,180.34
pads on no net: ATMEGA.1 ATMEGA.2 ATMEGA.9 ATMEGA.10 ATMEGA.11 ATMEGA.12 ATMEGA.13 ATMEGA.17 ATMEGA.19 ATMEGA.22 ATMEGA.25 ATMEGA.26 ATMEGA.32 CLK.7 QUARTZ.2 QUARTZ.4 TEMP.3 TEMP.5 TEMP.6 TEMP.7 TEMP.8

## Other copper
TopLayer:
  text "Face Top" at 3.175,12.065 h1.91 r90
  text "Cesari_Colas_Chaillou" at 158.369,4.953 h1.8
BottomLayer:
  text "Face Bottom" at 3.175,26.035 h1.91 r90
  text "Cesari_Colas_Chaillou" at 197.993,2.413 h1.8

## Text inside footprints (layer, text, board x,y; h text height)
LED-A0: TopOverlay "A" at 13.75,186.29 h1 r270; TopOverlay "C" at 11.35,186.29 h1 r270
LED-A1: TopOverlay "A" at 36.575,189.09 h1 r90; TopOverlay "C" at 38.975,189.09 h1 r90
LED-A2: TopOverlay "A" at 63.775,186.29 h1 r270; TopOverlay "C" at 61.375,186.29 h1 r270
LED-A3: TopOverlay "A" at 86.74,189.09 h1 r90; TopOverlay "C" at 89.14,189.09 h1 r90
LED-A4: TopOverlay "A" at 113.305,186.29 h1 r270; TopOverlay "C" at 110.905,186.29 h1 r270
LED-A5: TopOverlay "A" at 136.905,189.09 h1 r90; TopOverlay "C" at 139.305,189.09 h1 r90
LED-A6: TopOverlay "A" at 163.53,185.925 h1 r270; TopOverlay "C" at 161.13,185.925 h1 r270
LED-A7: TopOverlay "A" at 186.435,189.09 h1 r90; TopOverlay "C" at 188.835,189.09 h1 r90
LED-B0: TopOverlay "A" at 13.75,161.525 h1 r270; TopOverlay "C" at 11.35,161.525 h1 r270
LED-B1: TopOverlay "A" at 36.575,164.325 h1 r90; TopOverlay "C" at 38.975,164.325 h1 r90
LED-B2: TopOverlay "A" at 63.775,161.525 h1 r270; TopOverlay "C" at 61.375,161.525 h1 r270
LED-B3: TopOverlay "A" at 86.74,164.325 h1 r90; TopOverlay "C" at 89.14,164.325 h1 r90
LED-B4: TopOverlay "A" at 113.305,161.525 h1 r270; TopOverlay "C" at 110.905,161.525 h1 r270
LED-B5: TopOverlay "A" at 136.905,164.325 h1 r90; TopOverlay "C" at 139.305,164.325 h1 r90
LED-B6: TopOverlay "A" at 163.47,161.525 h1 r270; TopOverlay "C" at 161.07,161.525 h1 r270
LED-B7: TopOverlay "A" at 186.435,164.325 h1 r90; TopOverlay "C" at 188.835,164.325 h1 r90
LED-C0: TopOverlay "A" at 13.75,132.95 h1 r270; TopOverlay "C" at 11.35,132.95 h1 r270
LED-C1: TopOverlay "A" at 36.575,135.75 h1 r90; TopOverlay "C" at 38.975,135.75 h1 r90
LED-C2: TopOverlay "A" at 63.775,132.95 h1 r270; TopOverlay "C" at 61.375,132.95 h1 r270
LED-C3: TopOverlay "A" at 86.74,135.75 h1 r90; TopOverlay "C" at 89.14,135.75 h1 r90
LED-C4: TopOverlay "A" at 113.305,132.95 h1 r270; TopOverlay "C" at 110.905,132.95 h1 r270
LED-C5: TopOverlay "A" at 136.905,135.75 h1 r90; TopOverlay "C" at 139.305,135.75 h1 r90
LED-C6: TopOverlay "A" at 163.47,132.95 h1 r270; TopOverlay "C" at 161.07,132.95 h1 r270
LED-C7: TopOverlay "A" at 186.435,135.75 h1 r90; TopOverlay "C" at 188.835,135.75 h1 r90
LED-D0: TopOverlay "A" at 13.75,110.09 h1 r270; TopOverlay "C" at 11.35,110.09 h1 r270
LED-D1: TopOverlay "A" at 36.575,112.89 h1 r90; TopOverlay "C" at 38.975,112.89 h1 r90
LED-D2: TopOverlay "A" at 63.775,110.09 h1 r270; TopOverlay "C" at 61.375,110.09 h1 r270
LED-D3: TopOverlay "A" at 86.74,112.89 h1 r90; TopOverlay "C" at 89.14,112.89 h1 r90
LED-D4: TopOverlay "A" at 113.305,110.09 h1 r270; TopOverlay "C" at 110.905,110.09 h1 r270
LED-D5: TopOverlay "A" at 136.905,112.89 h1 r90; TopOverlay "C" at 139.305,112.89 h1 r90
LED-D6: TopOverlay "A" at 163.47,110.09 h1 r270; TopOverlay "C" at 161.07,110.09 h1 r270
LED-D7: TopOverlay "A" at 186.435,112.89 h1 r90; TopOverlay "C" at 188.835,112.89 h1 r90
LED-DP0: TopOverlay "A" at 13.67,10.665 h1 r270; TopOverlay "C" at 11.27,10.665 h1 r270
LED-DP1: TopOverlay "A" at 36.575,13.195 h1 r90; TopOverlay "C" at 38.975,13.195 h1 r90
LED-DP2: TopOverlay "A" at 63.835,10.665 h1 r270; TopOverlay "C" at 61.435,10.665 h1 r270
LED-DP3: TopOverlay "A" at 86.74,13.195 h1 r90; TopOverlay "C" at 89.14,13.195 h1 r90
LED-DP4: TopOverlay "A" at 113.305,10.395 h1 r270; TopOverlay "C" at 110.905,10.395 h1 r270
LED-DP5: TopOverlay "A" at 136.905,13.195 h1 r90; TopOverlay "C" at 139.305,13.195 h1 r90
LED-DP6: TopOverlay "A" at 163.47,10.395 h1 r270; TopOverlay "C" at 161.07,10.395 h1 r270
LED-DP7: TopOverlay "A" at 186.435,13.195 h1 r90; TopOverlay "C" at 188.835,13.195 h1 r90
LED-E0: TopOverlay "A" at 13.75,87.865 h1 r270; TopOverlay "C" at 11.35,87.865 h1 r270
LED-E1: TopOverlay "A" at 36.575,90.665 h1 r90; TopOverlay "C" at 38.975,90.665 h1 r90
LED-E2: TopOverlay "A" at 63.775,87.865 h1 r270; TopOverlay "C" at 61.375,87.865 h1 r270
LED-E3: TopOverlay "A" at 86.74,90.665 h1 r90; TopOverlay "C" at 89.14,90.665 h1 r90
LED-E4: TopOverlay "A" at 113.305,87.865 h1 r270; TopOverlay "C" at 110.905,87.865 h1 r270
LED-E5: TopOverlay "A" at 136.905,90.665 h1 r90; TopOverlay "C" at 139.305,90.665 h1 r90
LED-E6: TopOverlay "A" at 163.47,87.865 h1 r270; TopOverlay "C" at 161.07,87.865 h1 r270
LED-E7: TopOverlay "A" at 186.435,90.665 h1 r90; TopOverlay "C" at 188.835,90.665 h1 r90
LED-F0: TopOverlay "A" at 13.75,61.195 h1 r270; TopOverlay "C" at 11.35,61.195 h1 r270
LED-F1: TopOverlay "A" at 36.575,63.995 h1 r90; TopOverlay "C" at 38.975,63.995 h1 r90
LED-F2: TopOverlay "A" at 63.775,61.195 h1 r270; TopOverlay "C" at 61.375,61.195 h1 r270
LED-F3: TopOverlay "A" at 86.74,63.995 h1 r90; TopOverlay "C" at 89.14,63.995 h1 r90
LED-F4: TopOverlay "A" at 113.305,61.195 h1 r270; TopOverlay "C" at 110.905,61.195 h1 r270
LED-F5: TopOverlay "A" at 136.905,63.995 h1 r90; TopOverlay "C" at 139.305,63.995 h1 r90
LED-F6: TopOverlay "A" at 163.47,61.195 h1 r270; TopOverlay "C" at 161.07,61.195 h1 r270
LED-F7: TopOverlay "A" at 186.435,63.995 h1 r90; TopOverlay "C" at 188.835,63.995 h1 r90
LED-G0: TopOverlay "A" at 13.75,36.43 h1 r270; TopOverlay "C" at 11.35,36.43 h1 r270
LED-G1: TopOverlay "A" at 36.575,39.23 h1 r90; TopOverlay "C" at 38.975,39.23 h1 r90
LED-G2: TopOverlay "A" at 63.775,36.43 h1 r270; TopOverlay "C" at 61.375,36.43 h1 r270
LED-G3: TopOverlay "A" at 86.74,39.23 h1 r90; TopOverlay "C" at 89.14,39.23 h1 r90
LED-G4: TopOverlay "A" at 113.365,36.7 h1 r270; TopOverlay "C" at 110.965,36.7 h1 r270
LED-G5: TopOverlay "A" at 136.905,39.23 h1 r90; TopOverlay "C" at 139.305,39.23 h1 r90
LED-G6: TopOverlay "A" at 163.47,36.43 h1 r270; TopOverlay "C" at 161.07,36.43 h1 r270
LED-G7: TopOverlay "A" at 186.435,39.23 h1 r90; TopOverlay "C" at 188.835,39.23 h1 r90